# Altium PCB lappa-03.PcbDoc
Units mm, origin at the board's own origin, x right, y up, seen from the top; angles counter-clockwise.
Board outline 30 x 34 mm, 4 copper layers (Top, Ground Plane, Power Plane, Bottom), stack 0.983 mm thick; 86 components, 63 nets, 319 pads, 245 vias.
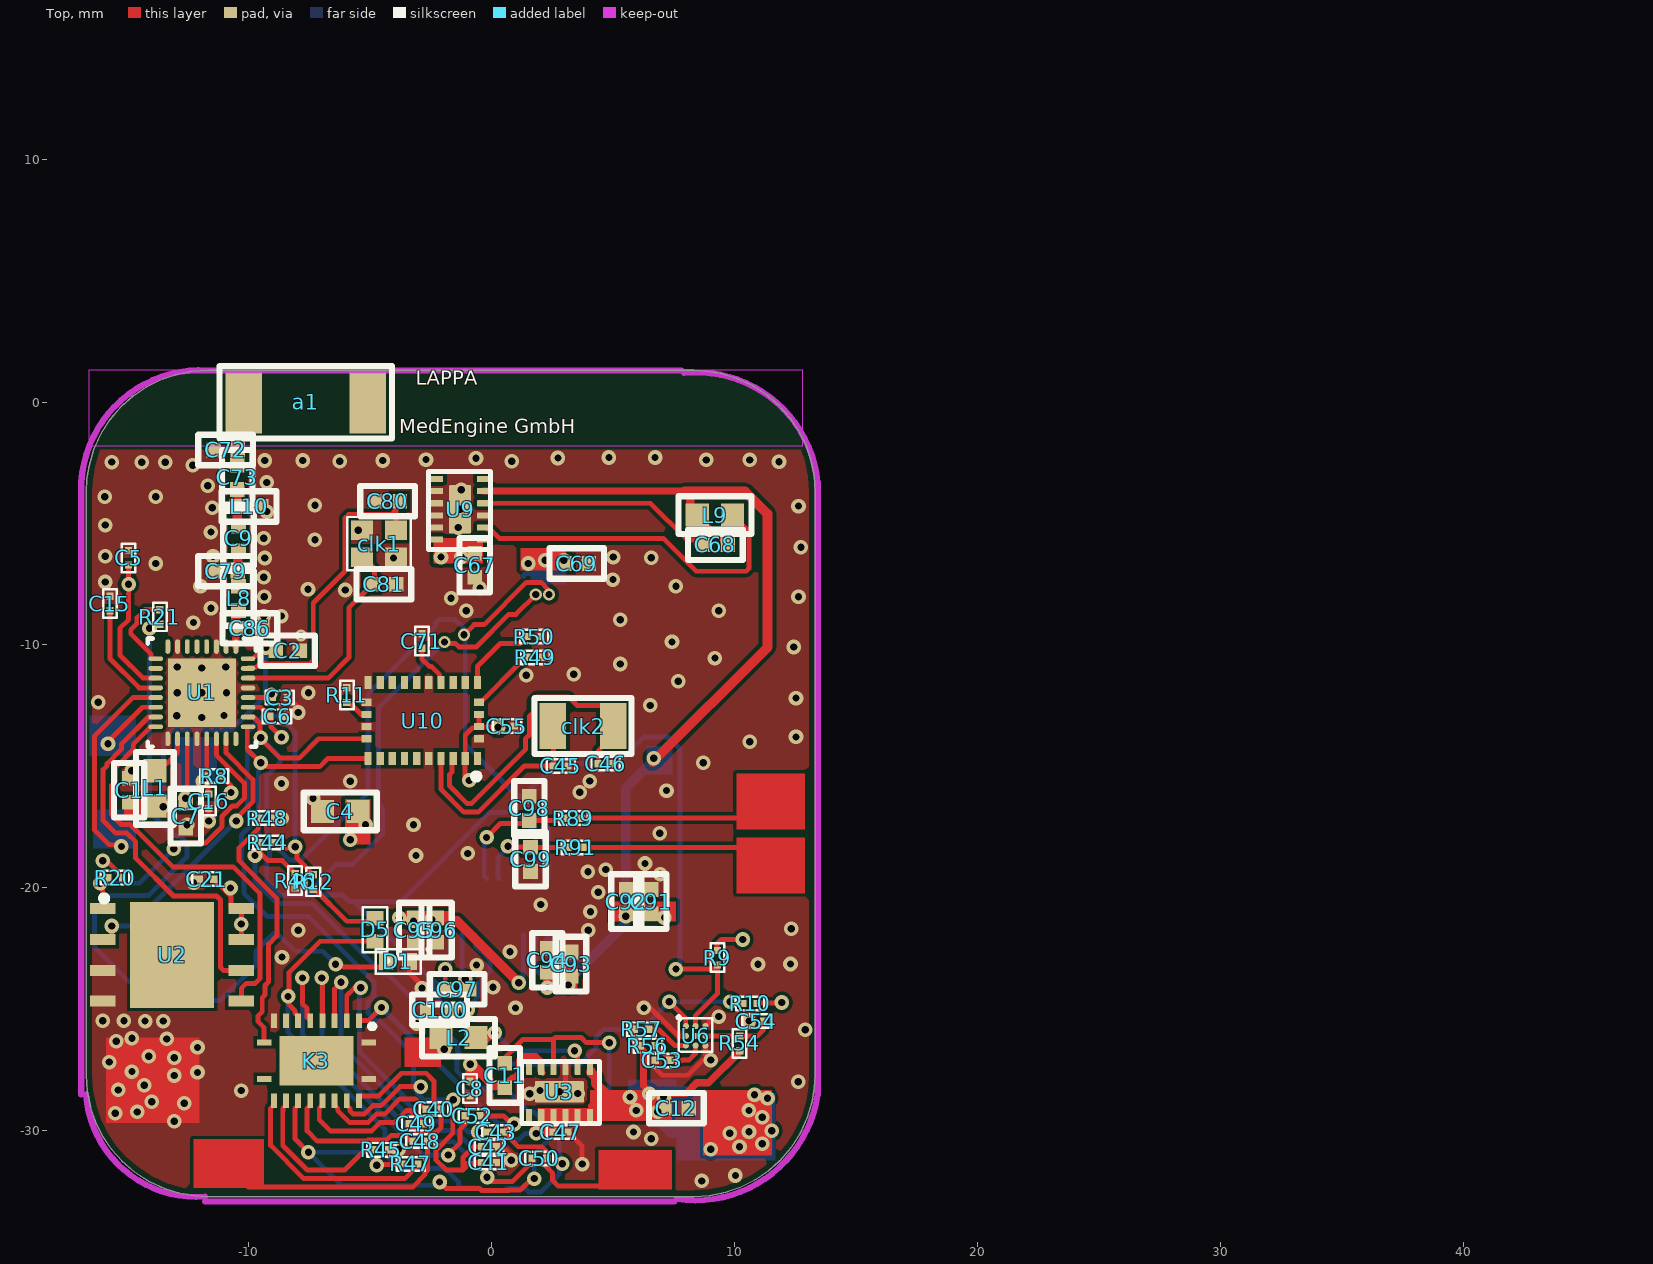
[diagram p0: Top view]
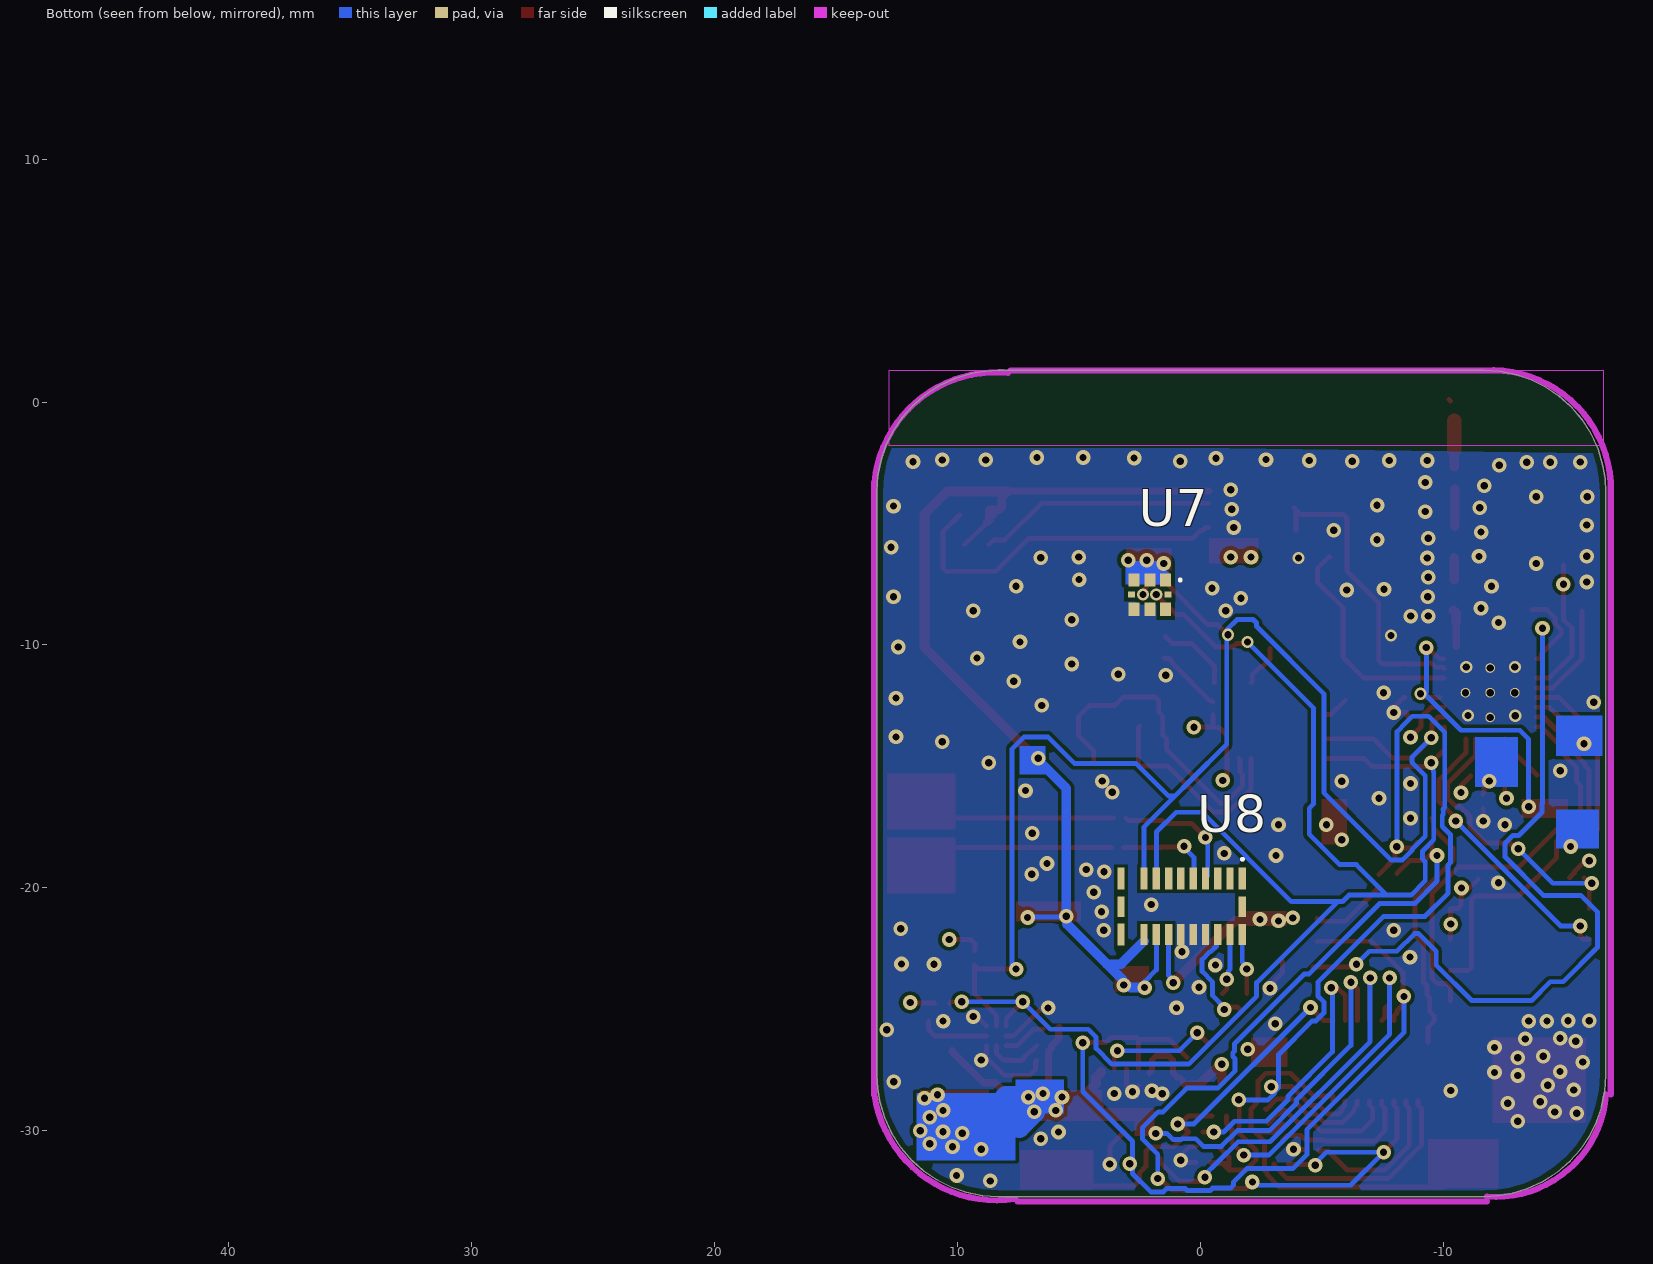
[diagram p1: Bottom view, seen from below]
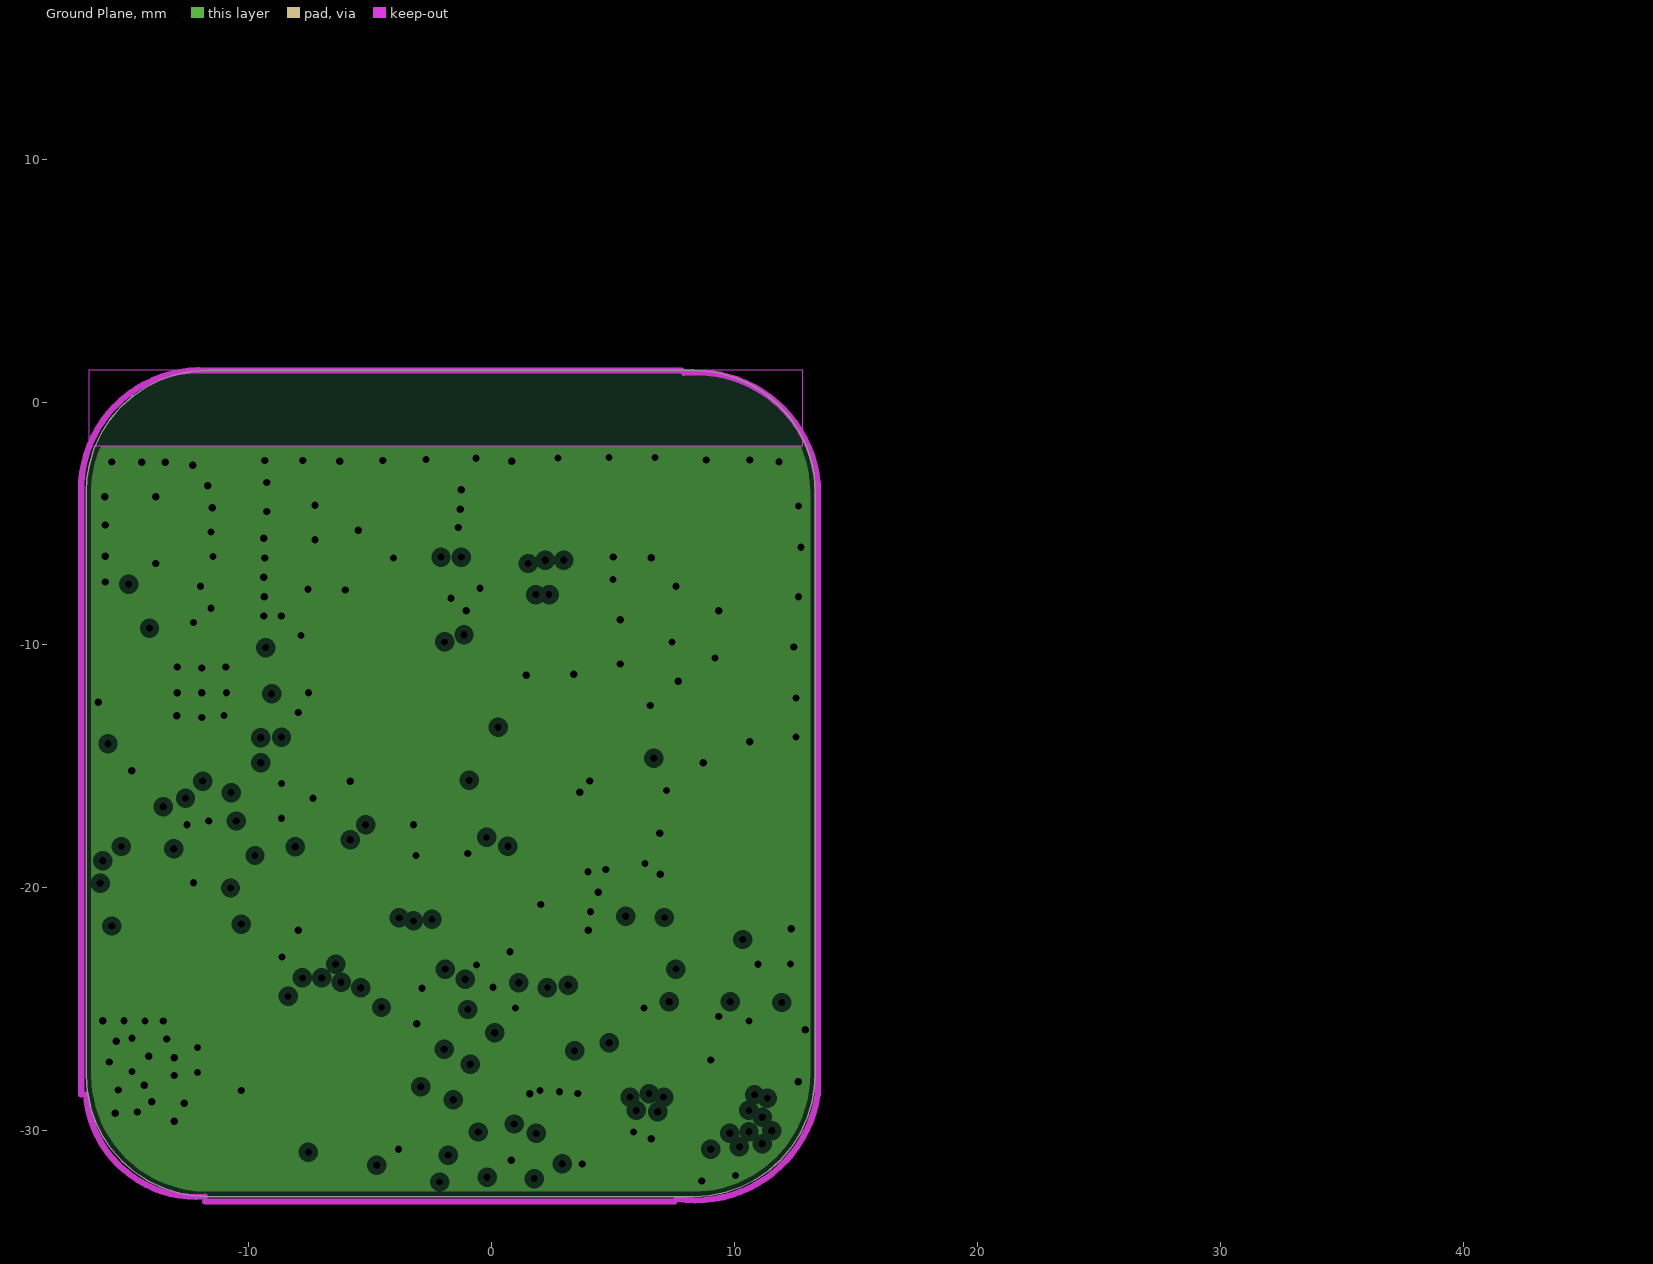
[diagram p2: Ground Plane, clearances drawn from the general rule]
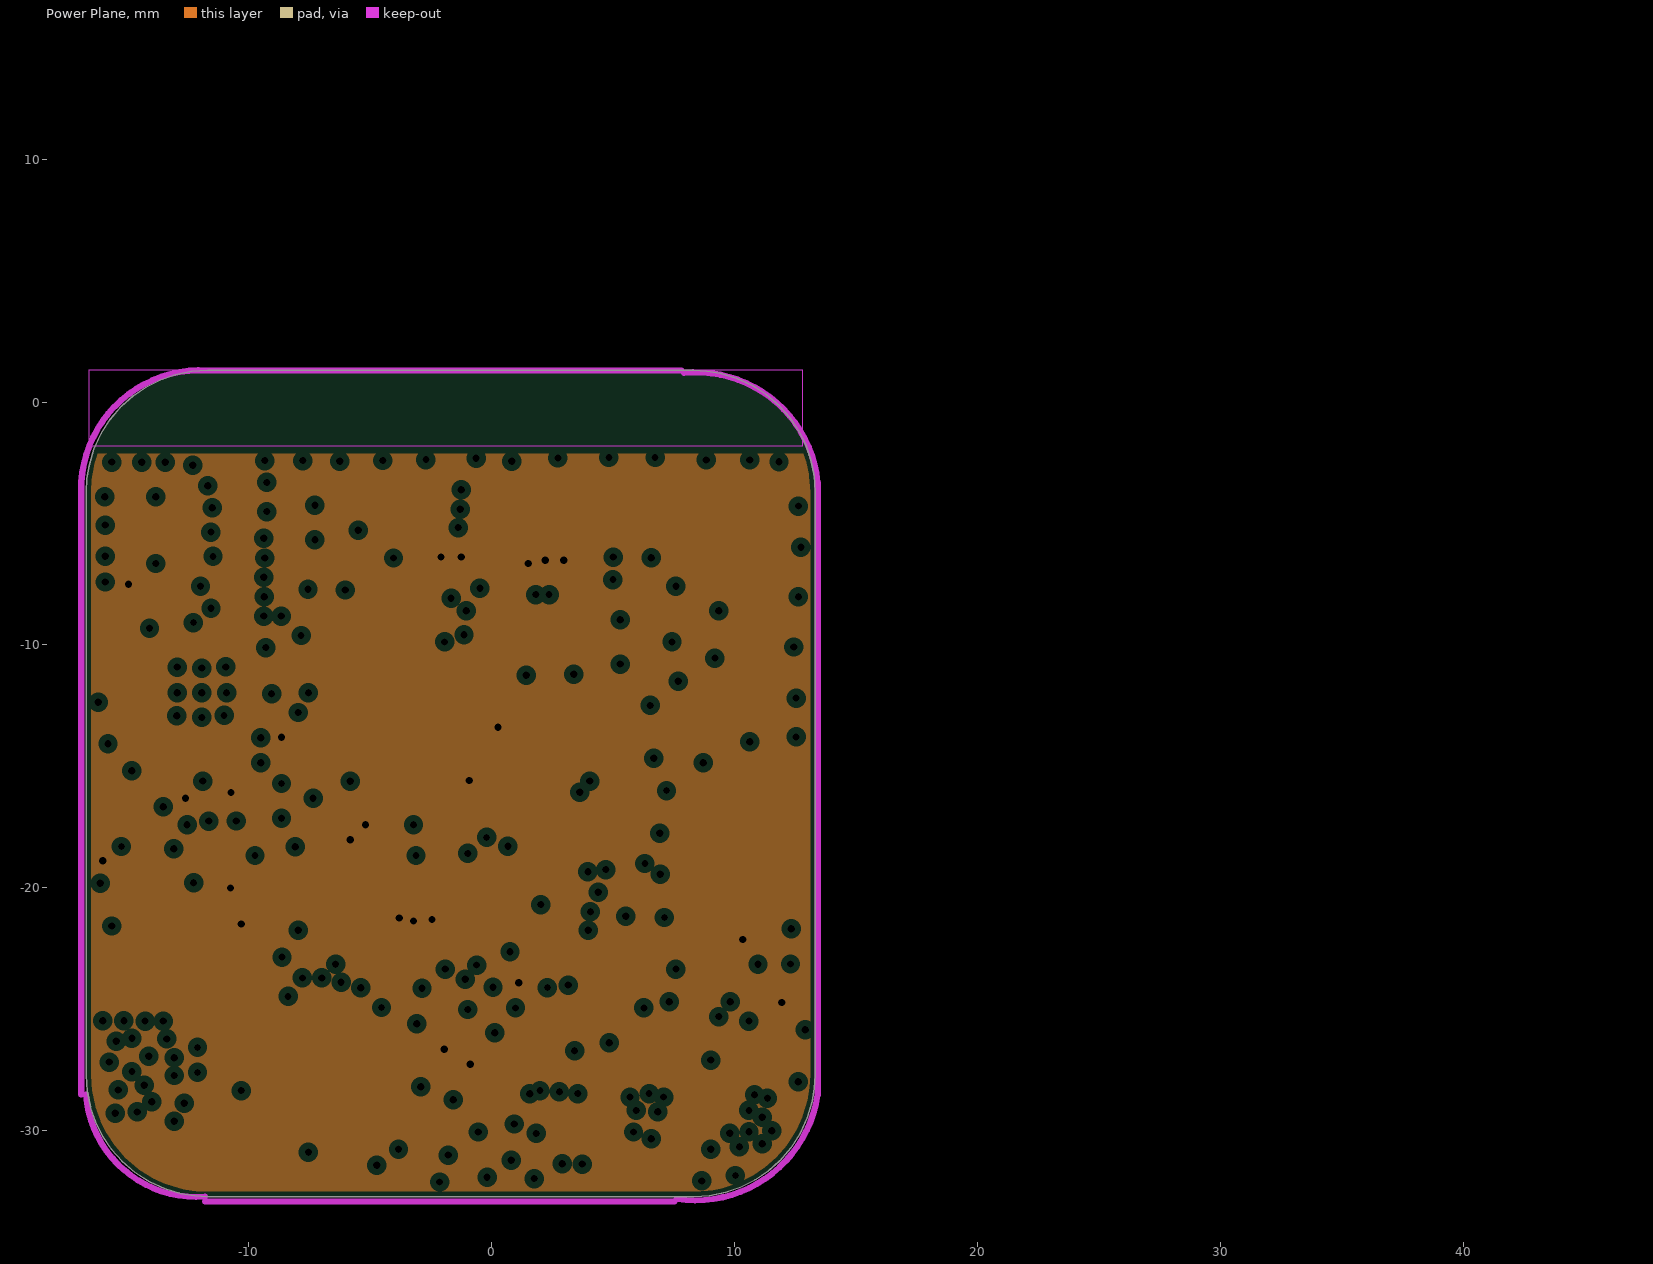
[diagram p3: Power Plane, clearances drawn from the general rule]
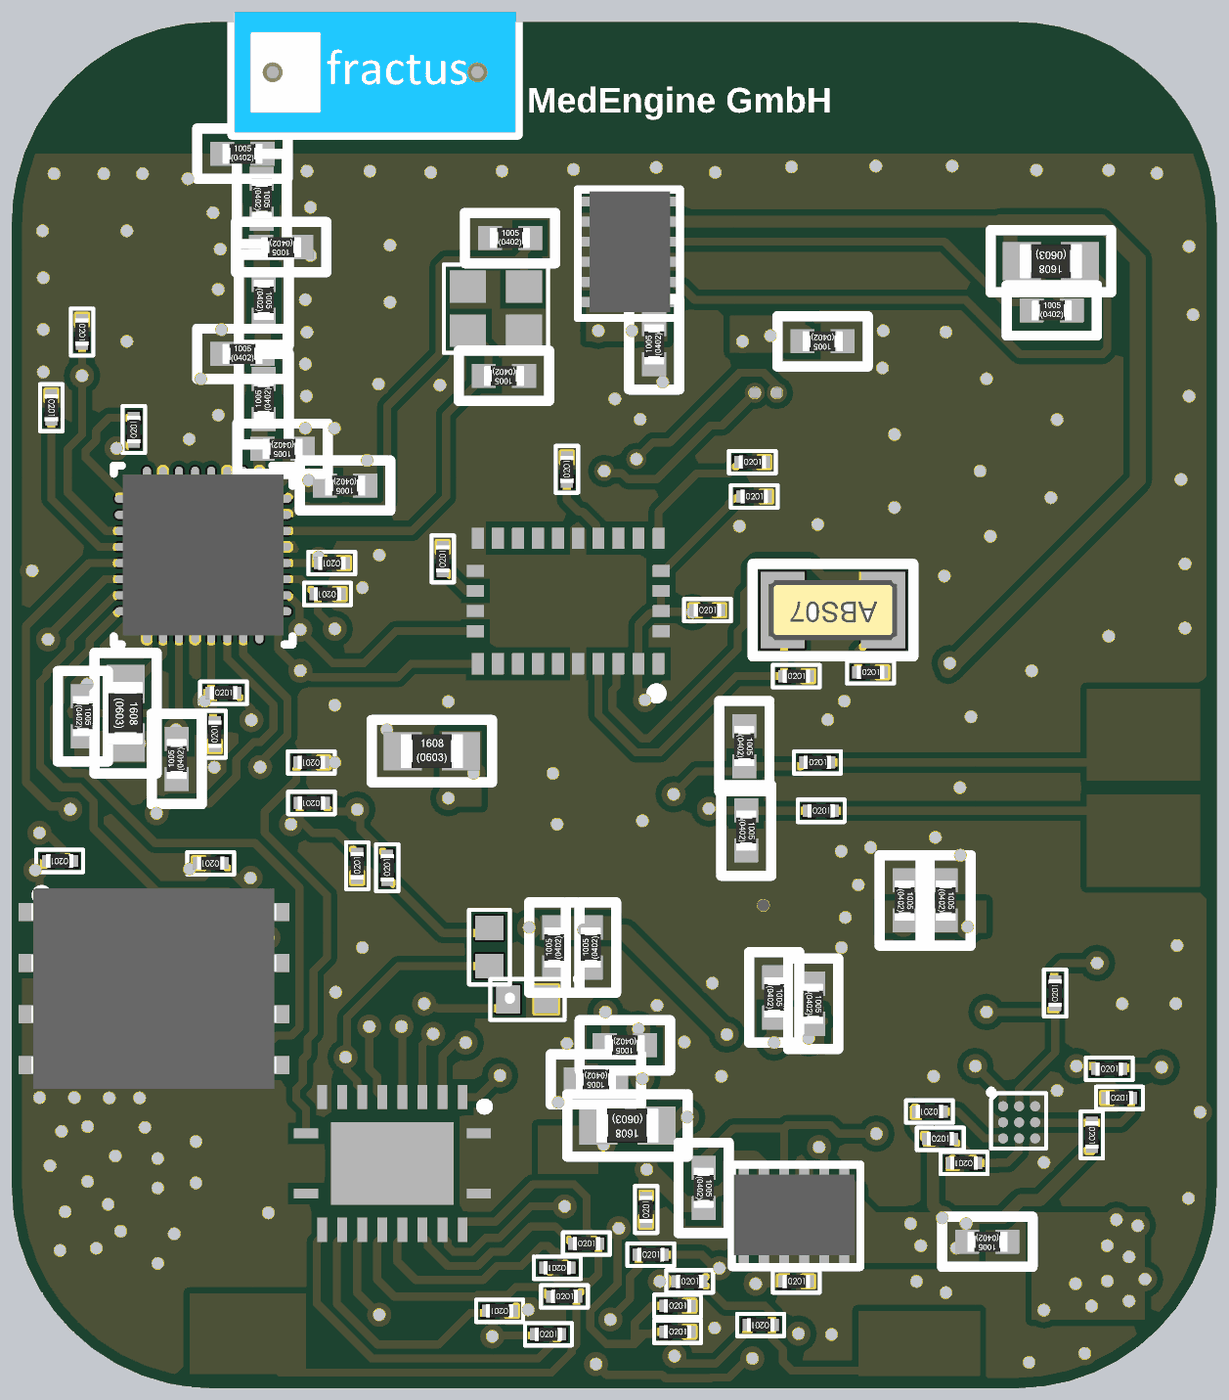
[diagram p4: 3D render of the assembled board from above, using the file's embedded part models]

## Layer stack, top to bottom
Top Solder: solder mask 0.0102, Solder Resist, Dk 3.5
Top: signal copper 0.0356
Dielectric 1: core 0.32, FR-4, Dk 4.4
Ground Plane: plane copper 0.036, net GND
Dielectric 3: prepreg 0.2, FR-4, Dk 4.4
Power Plane: plane copper 0.036, net VDD
Dielectric 4: core 0.32, FR-4, Dk 4.4
Bottom: signal copper 0.0356
Bottom Solder: solder mask 0.0102, Solder Resist, Dk 3.5

## Board outline
8.3,-32.7 8.956,-32.657 9.631,-32.52 10.246,-32.306 10.825,-32.016 11.36,-31.654 11.842,-31.229 12.307,-30.691 12.689,-30.096 12.982,-29.456 13.181,-28.785 13.271,-28.235 13.3,-27.7 13.3,-3.7 13.257,-3.044 13.12,-2.369 12.906,-1.754 12.616,-1.175 12.254,-0.64 11.829,-0.158 11.291,0.307 10.696,0.689 10.056,0.982 9.385,1.181 8.835,1.271 8.3,1.3 -11.7,1.3 -12.356,1.257 -13.031,1.12 -13.646,0.906 -14.225,0.616 -14.76,0.254 -15.242,-0.171 -15.707,-0.709 -16.089,-1.304 -16.382,-1.944 -16.581,-2.615 -16.671,-3.165 -16.7,-3.7 -16.7,-27.7 -16.657,-28.356 -16.52,-29.031 -16.306,-29.646 -16.016,-30.225 -15.654,-30.76 -15.229,-31.242 -14.691,-31.707 -14.096,-32.089 -13.456,-32.382 -12.785,-32.581 -12.235,-32.671 -11.7,-32.7

## Design rules (kind name [scope] priority, off if disabled: settings)
BoardOutlineClearance [OnLayer('Top')] p1: gap=0.25 ignorepadtopadclearanceinfootprint=FALSE except(0: Arc-SplitContinuation Track-SplitContinuation SMDPad-SplitContinuation THPad-SplitContinuation Via-SplitContinuation Fill-SplitContinuation Poly-SplitContinuation Region-SplitContinuation Text-SplitContinuation)
BoardOutlineClearance BoardOutlineClearance_1 [OnLayer('Bottom')] p2: gap=0.25 ignorepadtopadclearanceinfootprint=FALSE except(0: Arc-SplitContinuation Track-SplitContinuation SMDPad-SplitContinuation THPad-SplitContinuation Via-SplitContinuation Fill-SplitContinuation Poly-SplitContinuation Region-SplitContinuation Text-SplitContinuation)
Clearance KEEPOUT [OnLayer('Keep-Out Layer')] p1: gap=0.1 ignorepadtopadclearanceinfootprint=FALSE except(0: Arc-Hole Track-Hole SMDPad-Hole THPad-Hole Via-Hole Fill-Hole Poly-Hole Region-Hole Text-Hole)
Clearance ANT [InNet('Neta1_1')  OR    InNet('NetC69_2')    OR        InNet('RF_P')] p2: gap=0.2 ignorepadtopadclearanceinfootprint=FALSE except(0: Arc-Hole Track-Hole SMDPad-Hole THPad-Hole Via-Hole Fill-Hole Poly-Hole Region-Hole Text-Hole)
Clearance [All] p3: gap=0.15 ignorepadtopadclearanceinfootprint=FALSE except(0: Arc-Hole Track-Hole SMDPad-Hole THPad-Hole Via-Hole Fill-Hole Poly-Hole Region-Hole Text-Hole)
ComponentClearance [All] p1: gap=0.25 collisioncheckmode=3 verticalgap=0.25 showdistances=FALSE
DiffPairsRouting [All] p1: maxlimit=0.25 minlimit=0.25 mostfreqgap=0.25 toplayer_minwidth=0.381 toplayer_maxwidth=0.381 toplayer_prefwidth=0.381 bottomlayer_minwidth=0.381 bottomlayer_maxwidth=0.381 bottomlayer_prefwidth=0.381 maxuncoupledlength=12.5
Height [All] p1: minheight=0 maxheight=25 prefheight=12.5
HoleSize HoleSize-PTH [All] p1: absolutevalues=TRUE maxlimit=2 minlimit=0.25 maxpercent=80.000 minpercent=20.000
HoleToHoleClearance [All] p1: gap=0.35 allowstackedmicrovias=TRUE
MinimumAnnularRing "Minimum IAR  >0.45mm" [((ObjectKind = 'Pad') OR (ObjectKind = 'Via')) And (Layer = 'MultiLayer') And (HoleDiameter > AsMM(0.45))] p1: minimumring=0.15 // minimum inner annular ring for pads > 0.45mm finished hole size
MinimumAnnularRing "Minimum IAR <=0.45mm" [((ObjectKind = 'Pad') OR (ObjectKind = 'Via')) And (Layer = 'MultiLayer') And (HoleDiameter <= AsMM(0.45))] p2: minimumring=0.15 // minimum inner annular ring for pads <= 0.45mm finished hole size
MinimumSolderMaskSliver [All] p1: minsoldermaskwidth=0.08
NetAntennae [All] p1 off: netantennaetolerance=0
PlaneClearance PlaneClearance-IPI [All] p1: clearance=0.25
PlaneConnect [All] p1: planeconnectstyle=Relief reliefexpansion=0.175 reliefentries=4 reliefconductorwidth=0.2 reliefairgap=0.2
PolygonConnect PolygonConnect-xTW [All] p1: connectstyle=Direct reliefconductorwidth=0.2 reliefentries=4 polygonreliefangle="90 Angle" airgapwidth=0.2
RoutingCorners [All] p1: cornerstyle=45-Degree minsetback=2.5 maxsetback=2.5
RoutingVias "RoutingVias > 0.45mm" [(ObjectKind = 'Via') And (HoleDiameter > AsMM(0.45))] p1: holewidth=0.5 width=0.85 viastyle="Through Hole" minholewidth=0.5 minwidth=0.85 maxholewidth=0.9 maxwidth=1.25 // finishet hole size > 0.45mm
RoutingVias "RoutingVias <= 0.45mm" [(ObjectKind = 'Via') And (HoleDiameter <= AsMM(0.45))] p2: holewidth=0.3 width=0.65 viastyle="Through Hole" minholewidth=0.25 minwidth=0.6 maxholewidth=0.45 maxwidth=0.8 // finishet hole size <= 0.45mm
ShortCircuit ShortCircuit_1 [InNet('NetAE1_1') vs InNet('GND')] p1: allowed=TRUE
ShortCircuit [All] p2: allowed=FALSE
SilkToSilkClearance [All] p1: silktosilkclearance=0.2
SilkToSolderMaskClearance SilkscreenOverComponentPads [IsPad] p1 off: minsilkscreentomaskgap=0.3 clearancetoexposedcopper=TRUE
SolderMaskExpansion [All] p1: expansion=0 istentingtop=FALSE
Width Width-xTW [All] p1: maxlimit=1.5 minlimit=0.15 preferedwidth=0.2
17 further rules are at their usual default settings.

## Components (designator, comment, footprint, x,y, rotation, side; value= is the part's Value field where it differs from the comment)
a1 "NN01-104 - fractus" fractus-chip-antenna -7.657,0 r0 top
C1 "10UF" "Passive (0402, 1005)" -14.934,-15.978 r270 top
C2 "100NF" "Passive (0402, 1005)" -8.404,-10.233 r180 top
C3 "100NF" "PASSIVE (0201, 0603)" -8.431,-12.164 r180 top
C4 "22UF" "Passive (0603, 1608)" -6.244,-16.845 r0 top
C5 "100NF" "PASSIVE (0201, 0603)" -14.955,-6.109 r270 top
C6 "100NF" "PASSIVE (0201, 0603)" -8.537,-12.934 r180 top
C7 "10UF" "Passive (0402, 1005)" -12.597,-17.039 r90 top
C8 "100NF" "PASSIVE (0201, 0603)" -0.905,-28.556 r90 top
C9 "1.6pF" "Passive (0402, 1005)" -10.429,-5.613 r270 top
C11 "10UF" "Passive (0402, 1005)" 0.525,-27.715 r270 top
C12 "10UF" "Passive (0402, 1005)" 7.591,-29.057 r180 top net-tie
C15 "1UF" "PASSIVE (0201, 0603)" -15.719,-7.994 r270 top
C16 "100NF" "PASSIVE (0201, 0603)" -11.65,-16.729 r90 top
C21 "100NF" "PASSIVE (0201, 0603)" -11.446,-19.634 r180 top
C40 "0.01UF" "PASSIVE (0201, 0603)" -2.698,-29.102 r0 top
C41 "0.022UF" "PASSIVE (0201, 0603)" -0.428,-31.297 r0 top
C42 "4.7UF" "PASSIVE (0201, 0603)" -0.428,-30.649 r0 top
C43 "0.01UF" "PASSIVE (0201, 0603)" -0.129,-30.042 r0 top
C45 "22pF" "PASSIVE (0201, 0603)" 2.529,-14.979 r0 top
C46 "22pF" "PASSIVE (0201, 0603)" 4.377,-14.882 r0 top
C47 "4.7UF" "PASSIVE (0201, 0603)" 2.529,-30.042 r0 top
C48 "0.022UF" "PASSIVE (0201, 0603)" -3.246,-30.417 r0 top
C49 "0.47UF" "PASSIVE (0201, 0603)" -2.813,-29.702 r180 top
C50 "0.47UF" "PASSIVE (0201, 0603)" 2.251,-31.126 r180 top
C52 "0.022UF" "PASSIVE (0201, 0603)" -1.094,-29.379 r0 top
C53 "10NF" "PASSIVE (0201, 0603)" 7.316,-27.094 r180 top
C54 "1UF" "PASSIVE (0201, 0603)" 10.576,-25.477 r0 top
C55 "0.1uf" "PASSIVE (0201, 0603)" 0.319,-13.337 r0 top
C67 "10UF" "Passive (0402, 1005)" -0.707,-6.718 r90 top
C68 "10UF" "Passive (0402, 1005)" 9.196,-5.877 r0 top
C69 "0.1uF" "Passive (0402, 1005)" 3.489,-6.646 r180 top
C71 "0.1uf" "PASSIVE (0201, 0603)" -2.88,-10.136 r90 top
C72 "2.6pf" "Passive (0402, 1005)" -10.961,-1.975 r0 top
C73 "1.6pf" "Passive (0402, 1005)" -10.479,-3.1 r270 top
C79 "1.3pF" "Passive (0402, 1005)" -10.961,-6.957 r0 top
C80 "1pF" "Passive (0402, 1005)" -4.294,-4.077 r0 top
C81 "1pF" "Passive (0402, 1005)" -4.448,-7.502 r180 top
C86 "6.8PF" "Passive (0402, 1005)" -9.961,-9.318 r180 top
C91 "0.1uf" "Passive (0402, 1005)" 6.555,-20.561 r270 top
C92 "2.2uf" "Passive (0402, 1005)" 5.533,-20.561 r270 top
C93 "0.1uf" "Passive (0402, 1005)" 3.254,-23.133 r270 top
C94 "1pF" "Passive (0402, 1005)" 2.283,-22.974 r270 top
C95 "0.1uf" "Passive (0402, 1005)" -3.194,-21.733 r90 top
C96 "2.2uf" "Passive (0402, 1005)" -2.28,-21.733 r90 top
C97 "1UF" "Passive (0402, 1005)" -1.436,-24.166 r180 top
C98 "10PF" "Passive (0402, 1005)" 1.54,-16.722 r270 top
C99 "10PF" "Passive (0402, 1005)" 1.587,-18.82 r270 top
C100 "1UF" "Passive (0402, 1005)" -2.155,-25.015 r180 top
clk1 "24mhz Creatway clock" "24mhz creatway clock" -4.647,-5.849 r0 top
clk2 "ABS07-32.768KHZ-7-T" ABS07 3.747,-13.337 r180 top
D1 "DIODE RED" Diode -3.393,-23.026 r180 top
D5 "DIODE BLUE" Diode -4.808,-22.194 r90 top
K3 "BQ51051 - VQFN" "bq51051 - vqfn" -7.394,-27.116 r270 top
L1 "10uH" "Passive (0603, 1608)" -13.87,-15.901 r270 top value=10mH
L2 "10uH" "Passive (0603, 1608)" -1.373,-26.16 r180 top value=10mH
L8 "2nH" "Passive (0402, 1005)" -10.429,-8.082 r90 top value=10mH
L9 "10uH" "Passive (0603, 1608)" 9.175,-4.651 r180 top value=10mH
L10 "2nH" "Passive (0402, 1005)" -9.995,-4.3 r180 top value=10mH
R8 "102K" "PASSIVE (0201, 0603)" -11.734,-15.393 r0 top
R9 "4.7K" "PASSIVE (0201, 0603)" 9.28,-23.171 r90 top
R10 "4.7K" "PASSIVE (0201, 0603)" 10.324,-24.753 r0 top
R11 "10K" "PASSIVE (0201, 0603)" -5.971,-12.364 r90 top
R12 "1.5K" "PASSIVE (0201, 0603)" -7.354,-20.051 r90 top
R20 "10K" "PASSIVE (0201, 0603)" -15.204,-19.577 r180 top
R21 "1K" "PASSIVE (0201, 0603)" -13.666,-9.145 r90 top
R44 "100K" "PASSIVE (0201, 0603)" -8.934,-18.135 r180 top
R45 "10K" "PASSIVE (0201, 0603)" -4.248,-30.774 r180 top
R46 "140" "PASSIVE (0201, 0603)" -8.1,-20 r90 top
R47 "3.83K" "PASSIVE (0201, 0603)" -3.646,-31.358 r0 top
R48 "2.43K" "PASSIVE (0201, 0603)" -8.94,-17.126 r180 top
R49 "10K" "PASSIVE (0201, 0603)" 1.482,-10.507 r0 top
R50 "10K" "PASSIVE (0201, 0603)" 1.434,-9.652 r0 top
R54 "1K" "PASSIVE (0201, 0603)" 10.193,-26.095 r270 top
R56 "150" "PASSIVE (0201, 0603)" 6.115,-26.493 r0 top
R57 "4.7K" "PASSIVE (0201, 0603)" 6.455,-25.815 r180 top
R89 "R49.9K" "PASSIVE (0201, 0603)" 3.056,-17.126 r0 top
R91 "49.9K" "PASSIVE (0201, 0603)" 3.147,-18.329 r0 top
U1 "CC2640R2FRSMT" RSM0032B -11.938,-11.964 r270 top
U2 "MX25L3233F" MX25L32 -13.009,-22.8 r0 top
U3 "TPS6274X" TPS6274 2.779,-28.386 r270 top
U6 "MAX17043" MAX17043 7.983,-25.684 r0 top
U7 "MAX30208CLB+" MAX30208CLB 2.067,-7.926 r270 bottom
U8 "MAX86150EFF+T" MAX86150EFFT 0.759,-20.765 r270 bottom
U9 "TPS6274X" TPS6274 -1.31,-4.416 r180 top
U10 "BNO055" BNO055 -0.374,-15.246 r180 top

## Footprints (in the part's own frame and the unit in brackets; to place one, negate y for a bottom-side part, rotate by r counter-clockwise, add the part's x,y. Pads: shape width x height; smd on the part's side, far side on the other; paste and mask are expansions set on the pad)
"24mhz creatway clock" [mm]
  rect 0.9x0.8 smd: 1(-0.7,-0.533) 2(0.7,-0.533) 3(0.7,0.567) 4(-0.7,0.567)
  silkscreen extent -1.3,-1.08 1.3,1.12
ABS07 [mm] "32.768kHz Crystal"
  rect 1.1x1.9 smd mask+0.05: 1(-1.25,0) 2(1.25,0)
  silkscreen extent -2,-1.15 2,1.15, body extent -1.6,-0.75 1.6,0.75, height 0.89
BNO055 [mm]
  rect 0.3x0.525 smd: 1(0.224,-0.576) 6(0.224,-3.7) 7(0.724,-3.7) 8(1.224,-3.7) 9(1.724,-3.7) 10(2.224,-3.7) 11(2.724,-3.7) 12(3.224,-3.7) 13(3.724,-3.7) 14(4.224,-3.7) 15(4.724,-3.7) 20(4.724,-0.576) 21(4.224,-0.576) 22(3.724,-0.576) 23(3.224,-0.576) 24(2.724,-0.576) 25(2.224,-0.576) 26(1.724,-0.576) 27(1.224,-0.576) 28(0.724,-0.576)
  rect 0.425x0.3 smd: 2(0.162,-1.388) 3(0.162,-1.888) 4(0.162,-2.388) 5(0.162,-2.888) 16(4.787,-2.888) 17(4.787,-2.388) 18(4.787,-1.888) 19(4.787,-1.388)
  silkscreen extent 0.17,0.06 0.37,0.26, body extent -0.13,-4.77 5.05,-0.18, height 19.5
"bq51051 - vqfn" [mm]
  rect 0.24x0.6 smd: 1(-0.76,2.318) 10(-0.76,-1.982) 11(0.74,-1.982) 20(0.74,2.318)
  rect 0.6x0.24 smd: 2(-1.66,1.918) 3(-1.66,1.418) 4(-1.66,0.918) 5(-1.66,0.418) 6(-1.66,-0.082) 7(-1.66,-0.582) 8(-1.66,-1.082) 9(-1.66,-1.582) 12(1.64,-1.582) 13(1.64,-1.082) 14(1.64,-0.582) 15(1.64,-0.082) 16(1.64,0.418) 17(1.64,0.918) 18(1.64,1.418) 19(1.64,1.918)
  rect 2.05x3.05 smd: 21(-0.01,0.168)
  silkscreen extent -1.53,2.35 -1.33,2.57, body extent -2.11,-2.46 2.06,2.76, height 0.52
Diode [mm] "VLMW1500"
  rect 0.6x0.7 smd mask+0.05: 1(0,0) 2(0.95,0)
  silkscreen extent -0.81,-0.51 1.4,0.51, body extent -0.06,-0.25 1.03,0.28, height 0.35
fractus-chip-antenna [mm]
  rect 1.5x2.6 smd: 1(-2.55,0) 2(2.55,0)
  silkscreen extent -3.55,-1.5 3.55,1.48, body extent -3.5,-1.45 3.5,2.01, height 2.2
MAX17043 [mm]
  round 0.25 smd mask+0: A1(0,0) A2(0.4,0) A3(0.8,0) B1(0,-0.4) B2(0.4,-0.4) B3(0.8,-0.4) C1(0,-0.8) C2(0.4,-0.8) C3(0.8,-0.8)
  silkscreen extent -0.3,-1.05 1.07,0.36, body extent -0.3,-1.05 1.07,0.35, height 0.51
MAX30208CLB [mm]
  rect 0.55x0.45 smd: 1(-0.6,0.65) 2(-0.6,0) 3(-0.6,-0.65) 4(0.6,-0.65) 5(0.6,0) 6(0.6,0.65)
  rect 0.25x0.3 smd: 7(0,0.75) 8(0,0.25) 9(0,-0.25) 10(0,-0.75)
  silkscreen extent -0.65,1.2 -0.55,1.3, body extent -1,-1 1,1, height 0.95
MAX86150EFFT [mm]
  rect 0.9x0.3 smd: 1(-1.15,2.495) 2(-1.15,1.99) 3(-1.15,1.485) 4(-1.15,0.98) 5(-1.15,0.475) 6(-1.15,-0.03) 7(-1.15,-0.535) 8(-1.15,-1.04) 9(-1.15,-1.545) 10(-1.15,-2.495) 12(1.15,-2.495)
  rect 0.85x0.3 smd: 11(0,-2.495) 13(1.15,-1.545) 14(1.15,-1.04) 15(1.15,-0.535) 16(1.15,-0.03) 17(1.15,0.475) 18(1.15,0.98) 19(1.15,1.485) 20(1.15,1.99) 21(1.15,2.495) 22(0,2.495)
  silkscreen extent -2,2.45 -1.9,2.55, body extent -1.65,-2.8 1.65,2.8, height 1.5
MX25L32 [mm]
  rect 1.05x0.45 smd: 1(-3.005,1.951) 2(-3.005,0.681) 3(-3.005,-0.589) 4(-3.005,-1.859) 5(2.695,-1.859) 6(2.695,-0.589) 7(2.695,0.681) 8(2.695,1.951)
  rect 3.45x4.35 smd: 9(-0.155,0.046)
  silkscreen extent -3.08,2.25 -2.83,2.5, body extent -3.2,-2.45 2.9,2.55, height 0.8
"PASSIVE (0201, 0603)" [mm] "PASSIVE (0201, 0603)"
  rect 0.3x0.3 smd mask+0.05: 1(0,0) 2(0.6,0)
  silkscreen extent -0.28,-0.28 0.89,0.28, body extent -0.04,-0.16 0.64,0.16, height 0.34
"Passive (0402, 1005)" [mm]
  rect 0.6x0.6 smd: 1(-0.5,0) 2(0.5,0)
  silkscreen extent -1.12,-0.63 1.12,0.63, body extent -0.5,-0.25 0.5,0.25, height 0.35
"Passive (0603, 1608)" [mm]
  rect 0.95x0.95 smd: 1(-0.725,0) 2(0.725,0)
  silkscreen extent -1.5,-0.77 1.5,0.77, body extent -0.78,-0.43 0.77,0.42, height 0.45
RSM0032B [mm]
  oval 0.6x0.2 smd paste+0 mask+0.051: 1(-1.9,1.4) 2(-1.9,1) 3(-1.9,0.6) 4(-1.9,0.2) 5(-1.9,-0.2) 6(-1.9,-0.6) 7(-1.9,-1) 8(-1.9,-1.4) 17(1.9,-1.4) 18(1.9,-1) 19(1.9,-0.6) 20(1.9,-0.2) 21(1.9,0.2) 22(1.9,0.6) 23(1.9,1) 24(1.9,1.4)
  oval 0.2x0.6 smd paste+0 mask+0.051: 9(-1.4,-1.9) 10(-1,-1.9) 11(-0.6,-1.9) 12(-0.2,-1.9) 13(0.2,-1.9) 14(0.6,-1.9) 15(1,-1.9) 16(1.4,-1.9) 25(1.4,1.9) 26(1,1.9) 27(0.6,1.9) 28(0.2,1.9) 29(-0.2,1.9) 30(-0.6,1.9) 31(-1,1.9) 32(-1.4,1.9)
  rect 2.8x2.8 smd paste-1.387 mask+0.051: 33(0,0)
  round 0.4 hole 0.3 mask+0.051: V1(0,-1.016) V2(1.016,0) V3(0,0) V4(-1.016,0) V5(0,1.016)
  silkscreen extent -2.57,-2.23 2.23,2.23, body extent -2,-2 2,2, height 1
TPS6274 [mm] "STEP DOWN CONVERTER"
  rrect10% 0.5x0.25 smd paste+0 mask+0: 1(-0.95,1.25) 2(-0.95,0.75) 3(-0.95,0.25) 4(-0.95,-0.25) 5(-0.95,-0.75) 6(-0.95,-1.25) 7(0.95,-1.25) 8(0.95,-0.75) 9(0.95,-0.25) 10(0.95,0.25) 11(0.95,0.75) 12(0.95,1.25)
  rrect10% 0.9x2 smd paste+0 mask+0: 3(0,0)
  silkscreen extent -1.25,-1.55 1.3,1.65, body extent -1,-1.5 1,1.5, height 0.8

## Part data
a1: library part fractus-chip-antenna, "NN01-104"
C1 C2 C3 C4 C5 C6 C7 C8 C9 C11 C12 C15 C16 C21 C40 C41 C42 C43 C45 C46 C47 C48 C49 C50 C52 C53 C54 C55 C67 C68 C69 C71 C72 C73 C79 C80 C81 C86 C91 C92 C93 C94 C95 C96 C97 C98 C99 C100: library part Capacitor, "Ceramic chip capacitor"
clk2: "32 kHz"
D1: library part DIODE, "VLMW1500 - WHITE"
D5: library part DIODE, "VLMW1500 -BLUE"
L1 L2 L8 L9 L10: library part Inductor, "Inductor", Code_IEC=1005, Code_JEITA=0402, LatestRevisionDate=29-May-2009, LatestRevisionNote="IPC-7351 Footprint Added.", PackageDescription="Chip Inductor", PackageReference=0402-A, Published=8-Jun-2000, Publisher="Altium Limited"
R8 R9 R10 R11 R12 R20 R21 R44 R45 R46 R47 R48 R49 R50 R54 R56 R57 R89 R91: library part Resistor, "Resistor"
U1: library part CC2650F128RSMT, "CC26xx", Manufacturer="Texas Instruments", Alternate PartNumber=CC2650F128RSMT, CompType=IC, MountType=SMT, PackageReference=RSM0032B, PartNumber=CC2650F128RSMT, PIN_COUNT=33, RefDes=RefDes, RoHS=Y, Type=DEV
U2: library part MX25L32
U3 U9: "Step down converter"
U6: "I2C battery gauge"
U7: "Integrated Circuit", Manufacturer_Name="Maxim Integrated", Mouser2 Part Number=700-MAX30208CLB+, Datasheet Link=https://componentsearchengine.com//MAX30208CLB+.pdf, Height=0.85mm, Manufacturer_Part_Number=MAX30208CLB+, Mouser2 Price/Stock=https://www.mouser.com/Search/Refine.aspx?Keyword=700-MAX30208CLB%2B
U8: "Integrated Circuit", Manufacturer_Name="Maxim Integrated", Mouser2 Part Number=700-MAX86150EFF+T, Datasheet Link=https://componentsearchengine.com//MAX86150EFF+T.pdf, Height=1.4mm, Manufacturer_Part_Number=MAX86150EFF+T, Mouser2 Price/Stock=https://www.mouser.com/Search/Refine.aspx?Keyword=700-MAX86150EFF%2BT

## Via types
v1: diameter 0.6, hole 0.3, Top to Bottom, tented both sides, 228 vias
v2: diameter 0.5, hole 0.3, Top to Bottom, tented both sides, 11 vias
v3: diameter 0.6, hole 0.3, Top to Bottom, 6 vias

## Nets (pads, with @x,y where several pads share a name; then routed paths per layer and width w, separated by ;. In a path a pad name is that pad's centre, name@x,y a point inside that pad or via, vN(x,y) a via of type N, cw(c..) or ccw(c..) an arc to the next point about the centre after c; other vN are vias at no path point)
1V8: C68.2 C91.2 C92.2 C93.2 C94.2 L9.2 U8.13 U8.14 U9.5 | length 47.6
  Top w0.2: C94.2 2.38,-23.571 C93.2@3.529,-23.571 ; L9.2 8.722,-4.922 9.476,-5.677 9.496,-5.677 C68.2
  Top w0.3: U9.5 7.895,-3.666
  Top w0.35: 7.895,-3.666 7.913,-3.684 8.169,-3.94 8.169,-4.351 8.254,-4.436 8.665,-4.436 8.665,-4.837 8.75,-4.922 L9.2@8.722,-4.922
  Top w0.4: v1@6.612,-14.822 11.339,-10.095 11.339,-4.602 10.42,-3.684 7.913,-3.684
  Bottom w0.2: U8.14 1.799,-23.372 2.283,-23.856 v1(2.283,-24.099) ; U8.13@2.304,-22.19 U8.13 ; 5.481,-21.482 5.481,-21.176 v1@5.497,-21.16 ; v1(5.506,-21.168) 5.529,-21.192 7.075,-21.192 v1(7.099,-21.216) ; v1@6.586,-14.822 6.638,-14.822 6.822,-14.637 7.184,-14.637 7.254,-14.568
  Bottom w0.4: v1(2.283,-24.099) 2.865,-24.099 2.931,-24.033 3.048,-24.033 3.075,-24.006 3.075,-23.929 3.152,-23.929 3.179,-23.902 3.179,-23.785 3.831,-23.133 ; U8.13@2.304,-22.19 3.246,-23.133 3.831,-23.133 ; 5.481,-21.482 3.831,-23.133 ; v1(5.506,-21.168) 5.506,-15.902 v1@6.586,-14.822
  other v1: 3.141,-23.995 6.656,-14.657
3V3_PG: U3.7
3V3_SCLK: R9.1 U1.26 U6.A2 U7.9 U8.9 U10.19 | length 64.3
  Top w0.2: U1.26 -9.814,-12.964 -9.538,-13.24 -9.538,-13.803 v1(-9.518,-13.822) ; v1@-9.568,-13.802 -8.716,-14.653 -7.932,-14.653 -7.137,-13.858 U10.19 ; v2(-1.149,-9.576) -0.735,-9.162 -0.315,-9.162 1.42,-7.426 2.024,-7.426 2.317,-7.719 v2@2.317,-7.926 ; v1(7.571,-23.337) 9.114,-23.337 R9.1 9.28,-24.344 8.383,-25.241 U6.A2
  Bottom w0.2: v1(-9.518,-13.822) -8.716,-14.624 -8.716,-14.819 -9.27,-15.372 -9.27,-17.871 -8.75,-18.391 -8.75,-18.428 -8.328,-18.85 -7.872,-18.85 -5.094,-16.072 -5.094,-12.009 -2.325,-9.239 -2.325,-9.096 -2.178,-8.949 -1.525,-8.949 -1.1,-9.374 -1.1,-14.082 0.415,-15.597 1.038,-16.22 ; U8.9 2.304,-17.485 1.038,-16.22 ; v1(7.571,-23.337) 7.734,-23.173 7.734,-14.27 7.254,-13.79 6.254,-13.79 5.162,-14.882 2.626,-14.882 1.288,-16.22 1.038,-16.22
  other v2: 2.35,-7.926
3V3_SDA: R10.1 U1.25 U6.A1 U7.8 U8.8 U10.20 | length 66.4
  Top w0.2: U1.25 -10.068,-13.395 -10.068,-14.302 -9.523,-14.847 v1(-9.518,-14.843) ; -9.25,-15.003 -7.09,-15.003 -6.757,-14.671 U10.20 ; v2(-1.95,-9.874) -1.893,-9.931 -1.502,-9.931 -1.357,-10.076 -0.635,-10.076 0.7,-8.741 0.985,-8.741 v2(1.8,-7.926) ; v1(7.292,-24.684) 7.973,-25.365 7.973,-25.674 U6.A1 ; v1(9.812,-24.684) 10.254,-24.684 R10.1
  Bottom w0.2: v1(-9.518,-14.843) -9.595,-14.92 -9.595,-15.202 -9.62,-15.227 -9.62,-18.016 -9.159,-18.477 -9.159,-18.82 -9.269,-18.93 -9.269,-19.71 -8.689,-20.291 -7.686,-20.291 ; v2(-1.95,-9.874) -4.661,-12.585 -4.661,-16.551 -4.491,-16.721 -4.491,-17.786 -5.743,-19.038 -6.434,-19.038 -7.686,-20.291 ; U8.8 1.799,-17.695 0.987,-16.883 -0.082,-16.883 -3.757,-20.558 -5.861,-20.558 ; v1(9.812,-24.684) v1(7.292,-24.684) 6.16,-25.815 4.6,-25.815 4.278,-26.137 4.278,-26.6 3.628,-27.25 0.472,-27.25 -2.33,-24.448 -2.33,-23.893 -5.665,-20.558 -5.861,-20.558 ; -7.686,-20.291 -6.62,-20.291 -6.128,-20.291 -5.861,-20.558
AC1: C43.2 C50.1 C52.2 K3.2 | length 17.7
  Top w0.2: K3.2 -5.083,-25.456 v1(-4.544,-24.917) ; C52.2 0.477,-29.379 0.811,-29.713 v1(0.919,-29.713) ; v1@0.842,-29.789 0.724,-29.789 C43.2 1.08,-30.65 2.051,-30.65 2.229,-30.828 2.229,-31.461 2.499,-31.731 2.499,-32.037 2.729,-32.267 5.278,-32.267 5.826,-31.718
  Bottom w0.2: v1(-4.544,-24.917) 0.251,-29.713 v1(0.919,-29.713)
AC2: C40.2 C48.2 C49.2 K3.19 | length 16.9
  Top w0.2: -10.068,-32.267 -10.023,-32.312 -3.267,-32.312 -2.757,-31.803 -2.757,-31.722 -2.646,-31.611 -2.646,-31.104 C48.2 ; K3.19 -5.475,-28.576 -5.455,-28.556 -4.654,-28.556 -3.724,-27.626 -2.707,-27.626 -2.385,-27.948 -2.385,-28.761 -2.298,-28.848 -2.298,-28.902 C40.2 -2.098,-29.869 -2.281,-30.052 ; C49.2 -3.063,-30.052 -2.281,-30.052 ; C48.2 -2.281,-30.052
BOOT1: C43.1 K3.3 | length 11.2
  Top w0.2: K3.3 -5.975,-24.426 -5.715,-24.166 -5.649,-24.1 v1(-5.4,-24.1) ; v1(-0.566,-30.042) C43.1
  Bottom w0.2: v1(-5.4,-24.1) -5.444,-24.144 -5.444,-26.748 -3.62,-28.571 -3.62,-28.71 -2.732,-29.599 -1.417,-29.599 -0.974,-30.042 v1(-0.566,-30.042)
BOOT2: C40.1 K3.17 | length 4.9
  Top w0.2: K3.17 -6.455,-28.776 -6.455,-28.956 -6.345,-29.066 -6.345,-29.159 -5.849,-29.656 -5.107,-29.656 -4.757,-29.306 -4.414,-29.306 -3.787,-28.679 -3.157,-28.679 -2.716,-29.12 C40.1
CHG: C11.1 D5.1 K3.7 U3.4 | length 34.9
  Top w0.2: K3.7 -7.975,-25.276 -8.105,-25.146 -8.105,-25.052 -8.35,-24.808 -8.35,-23.472 -7.072,-22.194 D5.1 ; C11.1@0.525,-26.982 1.271,-26.236 2.529,-26.236 ; U3.4 2.529,-26.236 ; v1(4.828,-26.365) 3.882,-26.365 3.666,-26.15 2.615,-26.15 2.529,-26.236
  Bottom w0.2: v1(-8.39,-24.462) -8.39,-25.953 -4.395,-29.948 -4.395,-30.976 -3.83,-31.541 -1.936,-31.541 -1.371,-32.106 -1.371,-32.233 -1.254,-32.35 -0.516,-32.35 -0.416,-32.45 0.525,-32.45 0.608,-32.367 1.37,-32.367 1.511,-32.508 2.024,-32.508 2.779,-31.754 v1@2.779,-31.342 ; v1(2.888,-31.342) v1@2.779,-31.342 ; v1(4.828,-26.365) 4.828,-28.374 2.779,-30.424 v1@2.779,-31.342
CLMP1: C50.2 K3.5 | length 16.1
  Top w0.2: v1(-7,-23.7) -6.975,-23.725 K3.5 ; v1(-0.2,-31.9) -0.2,-32.084 0.835,-32.084 1.651,-31.268 C50.2
  Bottom w0.2: v1(-7,-23.7) -7,-26.32 -2.88,-30.441 -1.568,-30.441 -0.712,-31.297 -0.707,-31.297 -0.2,-31.804 v1(-0.2,-31.9)
CLMP2: C49.1 K3.16 | length 5.9
  Top w0.2: K3.16 -6.975,-28.936 -7.105,-29.066 -7.105,-29.159 -7.106,-29.161 -7.106,-29.539 -6.639,-30.006 -4.962,-30.006 -4.612,-29.656 -4.021,-29.656 -3.524,-29.159 -3.355,-29.159 -3.213,-29.302 -3.159,-29.302 -3.013,-29.448 -3.013,-29.502 C49.1
COM1: C52.1 K3.6 | length 14.2
  Top w0.2: v1(-7.8,-23.7) -7.8,-24.76 -7.605,-24.955 -7.605,-25.326 K3.6 ; v1(-1.796,-30.991) -1.796,-30.965 -1.312,-30.482 -1.312,-29.929 -1.094,-29.71 C52.1
  Bottom w0.2: v1(-7.8,-23.7) -7.8,-26.015 -2.825,-30.991 v1(-1.796,-30.991)
COM2: C48.1 K3.15 | length 5.9
  Top w0.2: K3.15 -7.475,-28.936 -7.605,-29.066 -7.605,-29.159 -7.606,-29.161 -7.606,-29.998 -7.187,-30.417 -5.145,-30.417 -5.101,-30.374 -4.343,-30.374 -4.152,-30.182 -3.581,-30.182 C48.1@-3.386,-30.378
DCDC_SW: L1.1 U1.18 | length 1.9
  Top w0.2: L1.1@-13.87,-15.362 -12.938,-14.429 U1.18
FOD: K3.14 R44.2 R46.2 R47.1 | length 39.9
  Top w0.2: v1(-9.75,-18.663) -9.675,-18.588 v1@-9.502,-18.588 ; R44.2 -9.534,-18.556 -9.215,-18.876 -8.624,-18.876 R46.2 ; K3.14 -7.975,-28.936 -8.105,-29.066 -8.105,-29.159 -8.106,-29.161 -8.106,-30.319 v1(-7.552,-30.873) ; v1(-4.737,-31.412) -4.71,-31.385 -3.673,-31.385 R47.1 ; v1(-2.155,-32.1) -1.888,-32.367 -0.511,-32.367 -0.428,-32.45 0.71,-32.45 0.725,-32.434 1.154,-32.434 1.631,-31.958 v1(1.739,-31.958)
  Bottom w0.2: v1(-9.75,-18.663) -9.75,-19.724 -8.834,-20.641 -7.384,-20.641 -4.491,-23.534 -4.297,-23.534 -1.417,-26.413 -1.417,-26.708 -1.347,-26.778 -1.347,-26.935 -1.441,-27.029 -1.441,-27.525 -0.732,-28.234 0.543,-28.234 1.521,-29.213 1.714,-29.213 2.373,-29.872 2.373,-30.328 1.742,-30.958 1.742,-31.954 v1(1.739,-31.958) ; v1(-4.737,-31.412) -4.737,-31.322 -5.186,-30.873 v1(-7.552,-30.873) -6.191,-32.235 v1@-2.023,-32.235
GND: C1.1 C2.1 C3.1 C4.1 C5.1 C6.1 C7.1 C8.1 C12.1 C15.1 C16.1 C21.2 C41.2 C42.2 C45.2 C46.2 C47.2 C53.2 C54.1 C55.2 C67.1 C69.1 C71.2 C72.1 C79.1 C80.1 C81.1 C86.1 C91.1 C92.1 C93.1 C94.1 C95.1 C96.1 C98.1 C99.2 C100.2 clk1.2 clk1.4 D1.1 K3.1 K3.9 K3.20 L10.1 R11.2 R45.1 R46.1 R48.1 R49.2 R50.2 U1.3 U1.7 U1.17 U1.20 U1.29 U1.33 U1.V1 U1.V2 U1.V3 U1.V4 U1.V5 U2.3 U2.4 U3.3 U6.A3 U6.B1 U6.C3 U7.4 U7.5 U8.16 U8.17 U8.18 U9.3 U9.8 U9.9 U9.10 U9.11 U10.2 U10.10 U10.15 U10.16 U10.18 U10.25 | length 15.9
  Top w0.2: v1(-12.279,-19.779) -12.19,-19.779 C21.2 ; v1(-11.66,-17.247) -11.655,-17.241 -11.655,-16.734 C16.1 ; C6.1 -8.514,-12.911 -8.514,-12.779 v1(-7.972,-12.779) -7.972,-12.57 -8.404,-12.138 C3.1 ; R45.1 -4.235,-30.761 -3.858,-30.761 v1(-3.845,-30.748) ; D1.1 -3.393,-23.493 -2.69,-24.196 -2.955,-24.196 v1(-2.88,-24.121) ; C41.2 0.177,-31.301 0.744,-31.301 0.919,-31.126 0.441,-30.649 C42.2 ; U3.3@2.529,-28.136 v3(2.779,-28.386) 3.029,-28.136 U3.3@3.029,-27.436 ; C47.2 3.712,-30.626 v1(3.712,-31.362) ; v1(6.254,-24.937) 6.52,-24.937 7.667,-26.084 U6.B1 ; C53.2 6.766,-27.144 6.766,-27.458 7.016,-27.707 8.056,-27.707 8.683,-27.081 v1(9,-27.081) 8.783,-26.863 U6.C3 ; U6.A3 9.175,-25.291 v1(9.328,-25.291)
  other v1: 8.631,-32.056 10.02,-31.833 0.8,-31.2 6.558,-30.321 5.826,-30.042 -13.069,-29.594 -15.503,-29.271 -14.599,-29.215 -12.659,-28.859 -13.995,-28.794 1.557,-28.47 -10.314,-28.336 -15.376,-28.309 -14.304,-28.123 12.6,-27.975 -13.069,-27.718 -12.118,-27.59 -14.815,-27.556 -15.752,-27.163 -13.069,-26.984 -14.124,-26.921 -12.118,-26.561 -15.465,-26.307 -13.387,-26.21 -14.815,-26.187 12.888,-25.83 -3.097,-25.587 -14.276,-25.477 -13.522,-25.477 10.576,-25.477 -16.014,-25.467 -15.145,-25.467 0.968,-24.937 0.044,-24.085 -0.632,-23.172 10.949,-23.133 12.286,-23.129 -8.639,-22.842 0.744,-22.619 -7.972,-21.733 3.958,-21.733 12.314,-21.683 4.054,-20.983 2.014,-20.683 4.377,-20.173 6.921,-19.436 3.951,-19.337 4.685,-19.241 6.297,-18.992 -3.124,-18.663 -0.999,-18.578 6.908,-17.752 -12.547,-17.396 -3.229,-17.398 -8.661,-17.126 -7.363,-16.312 3.616,-16.064 7.184,-15.991 -8.661,-15.7 -5.833,-15.612 4.029,-15.6 -14.826,-15.176 8.696,-14.847 10.614,-13.983 12.514,-13.783 6.52,-12.487 -16.197,-12.354 12.514,-12.183 -7.552,-11.964 7.667,-11.496 1.418,-11.246 3.367,-11.204 5.278,-10.783 9.175,-10.537 12.414,-10.083 7.411,-9.874 -12.285,-9.078 5.278,-8.963 -9.394,-8.809 -8.669,-8.809 -1.056,-8.586 9.328,-8.594 -11.561,-8.482 -1.683,-8.08 -9.369,-8.009 12.614,-8.01 -6.041,-7.737 -7.569,-7.709 -0.494,-7.661 -11.994,-7.579 7.571,-7.579 -15.92,-7.408 4.979,-7.309 -9.394,-7.209 -13.838,-6.646 -9.353,-6.421 6.558,-6.413 4.997,-6.382 -15.92,-6.351 -11.481,-6.354 12.714,-5.983 -7.286,-5.673 -9.394,-5.609 -11.564,-5.354 -5.497,-5.276 -15.92,-5.064 -9.264,-4.509 -11.513,-4.352 12.614,-4.283 -7.286,-4.255 -15.939,-3.896 -13.838,-3.896 -11.692,-3.444 -9.264,-3.309 -12.318,-2.6 -15.651,-2.473 -14.412,-2.475 -13.449,-2.475 11.814,-2.46 -6.268,-2.442 0.814,-2.441 -9.353,-2.409 -7.786,-2.409 -4.497,-2.407 8.814,-2.383 10.614,-2.383 -2.715,-2.369 -0.655,-2.316 2.714,-2.305 4.814,-2.283 6.714,-2.283
  other v2: -12.969,-12.909 -11.025,-12.9 -12.954,-10.909 -10.956,-10.902 -7.854,-9.609 -4.051,-6.421
  other v3: 3.529,-28.461 1.979,-28.336 -1.385,-5.166 -1.31,-4.416 -1.26,-3.616
GPIO_1: R21.2 U1.9 | length 3.4
  Top w0.2: U1.9 -14.021,-10.564 -14.021,-10.382 -14.867,-9.536 -14.867,-9.37 -14.605,-9.108 -14.605,-8.874 -14.276,-8.545 R21.2
INT: U10.14
JTAG_TCKC: U1.14 | length 2.6
  Top w0.2: v1(-15.8,-14.064) -15.8,-13.984 -14.381,-12.564 U1.14
JTAG_TMSC: U1.13 | length 8.4
  Top w0.2: v1(-15.247,-18.293) -15.319,-18.22 -15.754,-18.22 -16.35,-17.624 -16.35,-13.732 -14.782,-12.164 U1.13
MAX_INT: R57.1 U6.C1 | length 1.8
  Top w0.2: R57.1 6.853,-25.815 7.522,-26.484 U6.C1
MSPI_CLK: U1.15 U2.6 | length 15.6
  Top w0.2: U1.15 -14.133,-12.964 -15.25,-14.081 -15.25,-14.292 -15.837,-14.879 -15.837,-14.963 -16,-15.126 -16,-17.222 -15.479,-17.743 -15.019,-17.743 -14.666,-18.095 -14.666,-18.768 -13.106,-20.329 -11.335,-20.329 -11.169,-20.495 -11.169,-23.272 -11.052,-23.389 U2.6
NEGATIVE_PAD: R89.2 | length 7.4
  Top w0.2: R89.2@3.556,-17.126 R89.2 10.828,-17.126 10.949,-17.247
Neta1_1: a1.1 C72.2 C73.1 | length 2
  Top w0.2: C73.1@-10.47,-2.666 C73.1@-10.461,-2.656 ; a1.1@-10.469,-0.773 a1.1@-10.461,-0.782 ; a1.1@-10.314,0.035 a1.1@-10.249,0.1
  Top w0.4: C73.1@-10.461,-2.656 C72.2
  Top w0.6: C72.2 a1.1@-10.461,-0.782
NetC9_1: C9.1 C73.2 L10.2 | length 1.5
  Top w0.2: L10.2@-10.432,-4.277 L10.2@-10.422,-4.287
  Top w0.4: C9.1@-10.479,-5.113 C73.2
NetC9_2: C9.2 C79.2 L8.2 | length 0.9
  Top w0.2: C9.2@-10.48,-6.39 -10.461,-6.409 C9.2@-10.456,-6.413
  Top w0.4: L8.2@-10.456,-7.309 C9.2@-10.456,-6.413
NetC15_2: C15.2 U1.12 | length 4.3
  Top w0.2: C15.2 -15.719,-10.564 -14.519,-11.764 U1.12
NetC45_1: C45.1 clk2.2 U10.26 | length 8.7
  Top w0.2: U10.26 -2.098,-15.384 -2.098,-15.935 -1.154,-16.878 -0.565,-16.878 1.334,-14.979 C45.1 2.529,-13.368 clk2.2
NetC53_1: C53.1 R56.2 U6.C2 | length 2.4
  Top w0.2: R56.2 6.916,-26.694 6.97,-26.694 7.266,-26.991 7.266,-27.044 C53.1 7.832,-27.094 7.845,-27.081 8.104,-27.081 8.373,-26.811 8.373,-26.493 U6.C2
NetC54_2: C54.2 R54.1 U6.B3 | length 2.9
  Top w0.2: U6.B3 8.794,-26.095 R54.1 10.911,-26.095 11.176,-25.83 C54.2
NetC68_1: C68.1 U9.4 | length 9.8
  Top w0.2: U9.4 6.519,-4.166 8.03,-5.677 8.496,-5.677 C68.1
NetC71_1: C71.1 U10.9 | length 1.8
  Top w0.2: C71.1 -2.88,-10.586 -2.583,-10.883 -2.495,-10.883 -2.148,-11.23 -2.148,-11.496 U10.9
NetC97_1: C97.1 U8.20 | length 2.6
  Top w0.2: v1(-1.098,-23.76) -1.098,-24.166 C97.1@-0.919,-24.345
  Bottom w0.2: U8.20 -1.231,-23.351 -1.175,-23.407 -1.175,-23.683 v1(-1.098,-23.76)
NetC97_2: C97.2 U8.21 | length 2.5
  Top w0.2: C97.2@-1.919,-24.345 v1(-1.919,-23.337)
  Bottom w0.2: v1(-1.919,-23.337) -1.919,-23.229 -1.736,-23.046 U8.21
NetC98_2: C98.2 R89.1 U8.4 | length 5.3
  Top w0.2: v1(-0.221,-17.918) 0.35,-17.347 C98.2@1.481,-17.347 ; C98.2 2.96,-17.222 R89.1
  Bottom w0.2: U8.4 -0.317,-19.52 -0.317,-18.014 v1(-0.221,-17.918)
NetC99_1: C99.1 R91.1 U8.5 | length 4
  Top w0.2: v1(0.658,-18.277) 0.701,-18.32 C99.1 1.596,-18.329 R91.1
  Bottom w0.2: U8.5 0.245,-19.577 0.245,-18.75 0.658,-18.338 v1(0.658,-18.277)
NetC100_1: C100.1 U8.19 | length 4.5
  Top w0.2: C100.1 -1.537,-24.897 -1.103,-24.897 v1(-1,-25)
  Bottom w0.2: v1@-1.03,-24.897 v1@-1.005,-24.922 ; v1(-1,-25) -1,-24.916 -0.506,-24.423 -0.506,-23.858 -0.082,-23.434 -0.082,-22.945 -0.404,-22.622 -0.443,-22.622 -0.676,-22.389 -0.676,-21.965 U8.19
NetD1_2: D1.2 R21.1 | length 31
  Top w0.2: v1(-6.434,-23.133) -6.357,-23.209 -6.154,-23.209 -6.117,-23.246 -4.648,-23.246
  Bottom w0.2: v1(-14.093,-9.309) -14.093,-16.53 -14.072,-16.551 -14.072,-16.883 -13.115,-17.84 -12.871,-17.84 -12.549,-18.163 -12.549,-18.722 -14.131,-20.304 -15.671,-20.304 -16.35,-20.983 -16.35,-22.449 -14.941,-23.858 -14.417,-23.858 -13.646,-24.629 -11.176,-24.629 -9.72,-23.172 -9.72,-22.604 -8.993,-21.876 -8.827,-21.876 -8.1,-22.604 -6.963,-22.604 v1(-6.434,-23.133)
NetD5_2: D5.2 R12.1 | length 3.1
  Top w0.2: R12.1@-7.323,-20.02 -5.971,-21.371 -4.935,-21.371 D5.2
NetK3_10: K3.10 R48.2 | length 10.7
  Top w0.2: R48.2 -9.59,-17.176 -9.59,-17.263 -9.62,-17.293 -9.62,-17.566 -10.403,-18.349 -10.403,-18.877 -8.85,-20.43 -8.85,-21.972 -9.189,-22.311 -9.189,-23.862 -9.339,-24.012 -9.339,-24.395 -9.454,-24.51 -9.454,-25.088 -9.621,-25.255 -9.621,-25.501 -9.375,-25.747 K3.10
NetK3_12: K3.12 R47.2 | length 8.8
  Top w0.2: K3.12 -8.975,-28.936 -9.106,-29.067 -9.106,-30.592 -7.737,-31.962 -3.597,-31.962 -3.046,-31.411 R47.2
NetK3_13: K3.13 R45.2 | length 6.4
  Top w0.2: K3.13 -8.475,-28.936 -8.605,-29.066 -8.605,-29.159 -8.606,-29.161 -8.606,-30.597 -7.592,-31.612 -6.069,-31.612 -5.281,-30.824 -4.898,-30.824 R45.2
NetL2_1: L2.1 U3.2 | length 5
  Top w0.2: L2.1@-0.308,-26.365 0.104,-25.953 v1(0.116,-25.953) ; v1(3.4,-26.7) 3.529,-26.829 U3.2
  Bottom w0.2: v1@0.11,-25.953 0.857,-26.7 v1(3.4,-26.7)
NetL9_1: L9.1 U9.2 | length 14.2
  Top w0.2: U9.2 -0.235,-5.166 -0.11,-5.291 -0.014,-5.291 0.308,-5.613 7.053,-5.613 8.404,-6.965 10.459,-6.965 10.576,-6.848 10.576,-5.326 L9.1
NetR11_1: R11.1 U10.17 | length 1.1
  Top w0.2: R11.1@-5.975,-12.272 -5.389,-12.858 U10.17
NetR49_1: R49.1 U10.5 | length 2.8
  Top w0.2: U10.5 -0.485,-12.308 -0.423,-12.308 1.154,-10.731 1.154,-10.675 1.271,-10.557 1.456,-10.557 R49.1@1.477,-10.537
NetR50_1: R50.1 U10.6 | length 3.2
  Top w0.2: U10.6 -0.598,-10.885 0.35,-9.937 1.149,-9.937 R50.1
NRESET: U10.11
POSITIVE_PAD: R91.2 | length 7.4
  Top w0.2: R91.2@3.647,-18.329 R91.2 10.347,-18.329 10.838,-18.82
RECT: C41.1 C42.1 K3.18 R12.2 R44.1 | length 41.3
  Top w0.2: R44.1 -8.884,-18.185 -8.884,-18.233 -8.767,-18.35 v1@-8.1,-18.35 ; v1(-8.1,-18.3) -8.023,-18.376 -8.023,-18.782 R12.2 ; K3.18 -5.955,-28.776 -5.955,-28.956 -5.845,-29.066 -5.845,-29.159 -5.699,-29.306 -5.252,-29.306 -4.902,-28.956 -4.559,-28.956 -3.779,-28.176 v1(-2.935,-28.176) ; v1@-1.612,-28.785 -1.612,-30.1 -2.296,-30.784 -2.296,-31.198 -1.892,-31.602 -1.191,-31.602 ; C41.1 -0.707,-31.297 -0.753,-31.343 -0.932,-31.343 ; C42.1 -0.756,-30.649 -1.191,-31.083 -1.191,-31.343 ; -1.191,-31.602 -0.932,-31.343 ; -1.191,-31.602 -1.191,-31.343 ; -1.191,-31.343 -0.932,-31.343
  Bottom w0.2: v1(-8.1,-18.3) -8.111,-18.289 -8.111,-13.562 -8.446,-13.226 -8.739,-12.933 -9.407,-12.933 -10.068,-13.595 -10.068,-16.69 -9.995,-16.764 -10.008,-16.777 -10.008,-16.976 -9.97,-17.014 -9.97,-17.47 -10.3,-17.8 -10.3,-18.962 -10.209,-19.053 -10.209,-20.214 -9.257,-21.167 -7.556,-21.167 -4.85,-23.872 -4.85,-24.445 -5.094,-24.689 -5.094,-25.145 -4.772,-25.467 -4.616,-25.467 -3.232,-26.852 -3.232,-28.213 -3.07,-28.374 -3.07,-28.47 ; v1@-3.102,-28.343 v1(-2.935,-28.176) ; -3.058,-28.47 -2.809,-28.72 v1(-1.589,-28.72)
RESET_N: C16.2 R8.1 U1.21 | length 2.5
  Top w0.2: v1@-11.746,-15.574 -11.746,-15.393 -11.738,-15.385 U1.21 ; R8.1 -11.692,-15.435 -11.692,-15.574 -11.692,-15.887 -11.692,-16.087 C16.2
  other v1: -11.9,-15.6
RF_P: C86.2 L8.1 U1.1 | length 1.5
  Top w0.3: U1.1 C86.2@-10.538,-9.109
  Top w0.4: C86.2@-10.538,-9.109 -10.538,-8.691 L8.1
SPI_MCS: R20.2 U1.22 U2.1 | length 11.9
  Top w0.2: U2.1 -16.014,-19.787 R20.2 ; v1(-13.099,-18.39) -12.99,-18.39 -12.747,-18.147 -11.783,-18.147 -11.11,-17.474 -11.11,-17.055 -10.677,-16.622 -10.509,-16.622 -10.187,-16.3 -10.187,-15.686 -11.338,-14.535 U1.22
  Bottom w0.2: v1(-16.116,-19.804) -14.512,-19.804 v1(-13.099,-18.39)
SPI_MISO: U1.23 U2.2 | length 11.8
  Top w0.2: U2.2 -15.776,-22.119 -15.651,-21.994 v1(-15.651,-21.563) ; U1.23 -10.938,-14.44 -9.837,-15.541 -9.837,-16.445 -10.538,-17.146 v1@-10.538,-17.172
  Bottom w0.2: v1(-15.651,-21.563) -14.841,-21.563 v1(-10.52,-17.242)
SPI_MOSI: U1.16 U2.5 | length 16.9
  Top w0.2: U1.16 -14.038,-13.364 -14.763,-14.089 -14.763,-14.3 -15.487,-15.024 -15.487,-15.613 -15.65,-15.776 -15.65,-16.988 -15.245,-17.393 -14.874,-17.393 -14.276,-17.991 -13.136,-19.131 -10.644,-19.131 -9.539,-20.236 -9.539,-22.754 -9.539,-23.717 -9.747,-23.926 -10.106,-23.926 -10.314,-24.134 U2.5
VBAT+: C12.2 C47.1 K3.4 R54.2 R56.1 R57.2 U3.1 U3.8 U3.9 U3.10 U3.11 U3.12 | length 31
  Top w0.2: K3.4 -6.475,-24.148 v1(-6.21,-23.883) ; U3.9@2.433,-29.24 U3.9 ; U3.11 U3.11@3.529,-29.211 ; U3.12 4.029,-29.266 4.054,-29.241 4.054,-28.958 4.377,-28.958 ; 4.454,-29.241 4.638,-29.056
  Top w0.3: v1@1.698,-29.975 v1(1.823,-30.1) ; R57.2@5.795,-25.815 5.795,-25.755 R57.2 5.815,-25.856 5.815,-26.192 R56.1 6.115,-26.594 6.238,-26.717 6.238,-28.151 6.466,-28.379 v1(6.466,-28.46) 7.062,-28.46 7.983,-28.46 8.424,-28.019 8.911,-28.019 10.193,-26.736 R54.2
  Top w0.4: U3.12@4.054,-29.241 4.454,-29.241 ; U3.1@4.073,-27.567 4.073,-27.588 4.28,-27.795 4.28,-28.058 4.685,-28.464 4.685,-28.862
  Bottom w0.2: v1(-6.21,-23.883) -6.21,-26.477 -3.97,-28.716 -3.97,-28.855 -2.841,-29.984 -1.53,-29.984 -0.878,-30.636 -0.138,-30.636 0.176,-30.321 0.751,-30.321 0.778,-30.349 1.126,-30.349 1.374,-30.1 v1(1.823,-30.1) ; v1(7.062,-28.605) v1@7.115,-28.657
  Bottom w0.9: v1(6.822,-29.213) 7.442,-29.832 7.442,-28.605 7.981,-28.605 9.475,-30.099 v1(9.788,-30.099) ; v1@7.115,-29.213 v1@7.115,-28.657
  other v1: 9,-30.756 10.186,-30.655 11.119,-30.531 10.578,-30.034 11.517,-29.986 11.119,-29.431 5.933,-29.153 10.576,-29.153 11.339,-28.656 5.681,-28.605 10.806,-28.508
VDD: C4.2 C5.2 C6.2 C7.2 C8.2 C11.2 C21.1 C55.1 C67.2 C69.2 C95.2 C96.2 L2.2 R8.2 R9.2 R10.2 R20.1 U1.11 U1.19 U1.27 U2.7 U2.8 U3.5 U7.1 U7.2 U7.3 U8.15 U9.1 U9.12 U10.3 U10.4 U10.28 | length 35.9
  Top w0.2: v1(-16.015,-18.879) -15.939,-18.956 -15.773,-18.956 -15.404,-19.324 -15.404,-19.377 R20.1 ; v1(-14.955,-7.502) C5.2 ; v1@-14.872,-7.584 -14.949,-7.661 -14.949,-7.896 -14.955,-7.901 -14.955,-8.963 -15.309,-9.318 -15.309,-10.41 -14.355,-11.364 U1.11 ; C7.2@-12.661,-16.262 -12.711,-16.312 -12.707,-16.312 -12.538,-16.481 U1.19 ; C21.1 -10.739,-20.341 -10.739,-20.724 -10.614,-20.849 U2.8 U2.7 ; R8.2 -10.737,-15.79 v1(-10.737,-16.072) ; U1.27 -9.506,-12.564 -9.087,-12.984 -9.087,-13.376 v1(-8.661,-13.802) ; C95.2 -2.994,-21.433 v1@-2.604,-21.433 ; v1(-0.936,-15.574) -1.105,-15.405 -1.105,-14.678 U10.28 -1.098,-13.705 -0.801,-13.408 -0.585,-13.408 U10.3 ; C8.2 C8.2@-0.898,-27.949 ; v1(-0.891,-27.256) v1@-0.819,-27.256 ; C67.2 C67.2@-0.627,-6.137 ; U10.4 U10.3 ; v1(0.251,-13.387) 0.249,-13.387 0.236,-13.374 -0.52,-13.374 U10.3 ; C11.2@0.427,-28.117 C11.2 ; R9.2 9.259,-22.55 9.259,-22.299 9.439,-22.119 v1(10.324,-22.119) ; R10.2@10.929,-24.753 10.949,-24.733 11.91,-24.733 v1(11.931,-24.712)
  Top w0.24: 1.777,-26.916 1.814,-26.916 1.979,-27.081 1.979,-27.499 U3.5@2.088,-27.608
  Top w0.25: C11.2 0.7,-28.04 0.7,-27.937 0.847,-27.79 0.939,-27.79 1.118,-27.611 1.118,-27.09 1.297,-26.911 1.76,-26.911 1.765,-26.916 1.777,-26.916
  Top w0.4: v1@-2.604,-21.253 -2.501,-21.253 -2.399,-21.355 -1.439,-21.355 v1(1.103,-23.897) ; C8.2@-0.898,-27.949 v1@-0.898,-27.333 ; v1@-0.819,-27.256 0.042,-28.117 C11.2@0.427,-28.117
  Bottom w0.2: v1(1.103,-23.897) 1.103,-23.788 1.294,-23.597 U8.15 ; U7.1@1.3,-7.174 1.3,-7.13 1.375,-7.055 1.831,-7.055
  other v1: -1.967,-26.641 -10.314,-21.484 -3.229,-21.357 -2.466,-21.293 -3.819,-21.233 -10.759,-20 -5.833,-18.014 -5.201,-17.398 -12.612,-16.312 1.495,-6.646 2.191,-6.506 2.956,-6.506 -2.098,-6.382 -1.26,-6.382
VDDR: C1.2 C2.2 C3.2 L1.2 U1.28 U1.32 | length 13
  Top w0.2: C1.2 -14.786,-16.626 L1.2 ; v1(-13.522,-16.655) -13.522,-16.671 L1.2@-13.396,-16.798 ; U1.32 -9.961,-10.564 -9.878,-10.564 v1(-9.313,-10.106) ; U1.28@-9.88,-12.164 C3.2@-9.069,-12.164
  Bottom w0.2: v1(-13.522,-16.655) -13.522,-13.87 -13.161,-13.509 -10.737,-13.509 v2@-9.237,-12.009 ; v1(-9.313,-10.106) -9.313,-11.933 v2@-9.237,-12.009 ; v2(-9.069,-12.009) v2@-9.237,-12.009
X24M_N: C81.2 clk1.1 U1.30 | length 9.3
  Top w0.2: U1.30 -6.738,-11.364 -5.887,-10.514 -5.887,-8.464 -4.832,-7.409 -4.832,-6.848 -5.297,-6.382 clk1.1
X24M_P: C80.2 clk1.3 U1.31 | length 12.5
  Top w0.2: U1.31 -9.995,-10.914 -9.693,-10.914 -9.517,-10.738 -9.353,-10.738 -9.308,-10.783 -8.501,-10.783 -8.476,-10.759 -8.332,-10.759 -8.308,-10.783 -7.501,-10.783 -7.354,-10.637 -7.354,-8.272 -6.047,-6.965 -6.047,-4.778 -5.901,-4.632 -4.149,-4.632 -3.947,-4.43 ; clk1.3 -3.947,-4.43 ; C80.2@-3.871,-4.354 -3.947,-4.43
X32_Q1: U1.5
X32_Q2: U1.6
XIN32: C46.1 clk2.1 U10.27 | length 13.6
  Top w0.2: U10.27 -1.648,-14.721 -1.648,-15.233 -1.748,-15.333 -1.748,-15.79 -1.009,-16.528 -0.844,-16.528 0.528,-15.156 1.375,-14.309 1.375,-13.866 1.536,-13.705 1.536,-12.929 1.697,-12.768 1.697,-12.283 1.844,-12.137 3.151,-12.137 3.501,-12.487 4.547,-12.487 4.997,-12.937 clk2.1 4.997,-13.737 4.377,-14.357 C46.1
pads on no net: a1.2 K3.8 K3.11 K3.21 U1.2 U1.4 U1.8 U1.10 U1.24 U2.9 U3.6 U6.B2 U7.6 U7.7 U7.10 U8.1 U8.2 U8.3 U8.6 U8.7 U8.10 U8.11 U8.12 U8.22 U9.6 U9.7 U10.1 U10.7 U10.8 U10.12 U10.13 U10.21 U10.22 U10.23 U10.24

## Polygon pours and split planes (outlines as drawn)
GND on Bottom "g" (solid, remove dead copper, pour order 22): 14,-1.7 15.329,-43.397 -4.147,-41.384 -16.425,-43.135 -18.796,-40.231 -19.154,-2.154
no net on Bottom "NONET_L04_P018" (solid, pour order 18): 22.97,-15.611
GND on Top "g" (solid, remove dead copper, pour order 20): 13.5,-1.975 16.604,-43.805 -18.608,-42.812 -17.389,-1.975
GND on Ground Plane (split plane): 12.72,-1.833 12.925,-2.423 13.056,-3.071 13.098,-3.707 13.098,-27.695 13.07,-28.213 12.984,-28.739 12.792,-29.385 12.511,-29.999 12.145,-30.57 11.698,-31.087 11.236,-31.494 10.723,-31.841 10.167,-32.12 9.577,-32.325 8.929,-32.456 8.293,-32.498 -11.695,-32.498 -12.213,-32.47 -12.739,-32.384 -13.385,-32.192 -13.999,-31.911 -14.57,-31.545 -15.087,-31.098 -15.494,-30.636 -15.841,-30.123 -16.12,-29.567 -16.325,-28.977 -16.456,-28.329 -16.498,-27.693 -16.498,-3.705 -16.47,-3.187 -16.384,-2.661 -16.192,-2.015 -16.094,-1.8 12.703,-1.8
VDD on Power Plane (split plane): 12.925,-2.423 13.056,-3.071 13.098,-3.707 13.098,-27.695 13.07,-28.213 12.984,-28.739 12.792,-29.385 12.511,-29.999 12.145,-30.57 11.698,-31.087 11.236,-31.494 10.723,-31.841 10.167,-32.12 9.577,-32.325 8.929,-32.456 8.293,-32.498 -11.695,-32.498 -12.213,-32.47 -12.739,-32.384 -13.385,-32.192 -13.999,-31.911 -14.57,-31.545 -15.087,-31.098 -15.494,-30.636 -15.841,-30.123 -16.12,-29.567 -16.325,-28.977 -16.456,-28.329 -16.498,-27.693 -16.498,-3.705 -16.47,-3.187 -16.384,-2.661 -16.217,-2.1 12.812,-2.1

## Keep-outs
Keep-Out Layer:
  rectangle: -16.6,-1.8 12.8,1.3
  lines w0.254: -16.9,-28.5 -16.9,-3.3 cw(c-12,-3.6) -11.7,1.3 7.8,1.3 ; -16.711,-28.5 ccw(c-12.155,-28.145) -11.815,-32.701 ; -11.8,-32.9 7.5,-32.9 ; 7.6,-32.8 ccw(c8.359,-27.754) 13.405,-28.513 13.405,-3.313 ccw(c8.396,-3.809) 7.9,1.2

## Other copper
Top:
  rectangle net VDD: -6.047,-18.22 -5.001,-16.336
  rectangle net VDD: 1.179,-6.926 3.056,-6.009
  rectangle net GND: -15.893,-29.665 -12.036,-26.156
  region net VBAT+: 11.517,-30.999 11.517,-28.322 8.695,-28.322 8.695,-30.999
  region net AC2: -9.378,-32.345 -9.378,-30.339 -12.279,-30.339 -12.279,-32.345
  region net AC1: 7.411,-32.402 7.411,-30.774 4.377,-30.774 4.377,-32.402
  region net VDD: -0.374,-5.603 -2.399,-5.603 -2.399,-6.646 -0.374,-6.646
  rectangle net 1V8: 4.908,-21.371 7.571,-20.561
  rectangle net VDD: -3.553,-21.555 -1.655,-20.951
  rectangle net 1V8: 2.092,-24.258 3.529,-23.203
  rectangle net POSITIVE_PAD: 10.064,-20.217 12.888,-17.918
  rectangle net NEGATIVE_PAD: 10.064,-17.586 12.888,-15.287
  rectangle net VDDR: -15.145,-17.126 -13.226,-16.336
  rectangle net VDD: -3.602,-27.372 -2.098,-26.16
  rectangle net VBAT+: 1.886,-29.59 4.222,-29.057
  region net VBAT+: 1.886,-29.066 2.677,-29.066 2.677,-30.194 1.536,-30.194 1.539,-30.037 1.886,-30.037
  region net VBAT+: 4.054,-28.322 7.393,-28.322 7.393,-29.586 4.054,-29.586
Bottom:
  rectangle net 1V8: 6.355,-15.34 7.431,-14.161
  rectangle net VBAT+: 7.591,-31.205 11.678,-28.432
  rectangle net VDD: 1.585,-7.502 3.077,-6.551
  region net VBAT+: 7.591,-29.283 7.591,-27.88 5.593,-27.88 5.593,-29.283
  rectangle net RESET_N: -13.084,-15.838 -11.306,-13.793
  rectangle net JTAG_TMSC: -16.424,-18.379 -14.645,-16.777
  rectangle net JTAG_TCKC: -16.565,-14.568 -14.645,-12.9
  region: 5.2,-33.1
  region net VDD: 2.9,-6.551
Ground Plane (plane layer: these items are gaps in the copper):
  rectangle: -16.961,-1.8 13.2,3.3
  region: 44.923,-0.044
  region: 46.041,7.881
  region: -5.089,14.104
Power Plane (plane layer: these items are gaps in the copper):
  rectangle: -16.6,-2.1 13.6,3.2

## Silkscreen, mask and mechanical layers (free items; w line width, h text height)
Top Overlay:
  text "LAPPA" at -3.132,0.5 h1
  text "MedEngine GmbH" at -3.819,-1.5 h1